# Altium PCB PCB1.PcbDoc
Units mm, origin at the board's own origin, x right, y up, seen from the top; angles counter-clockwise.
Board outline 152.4 x 101.6 mm, 2 copper layers (Top Layer, Bottom Layer); 4 components, 7 nets, 35 pads, 4 vias.
Unrouted connection lines stored in the file: 6.
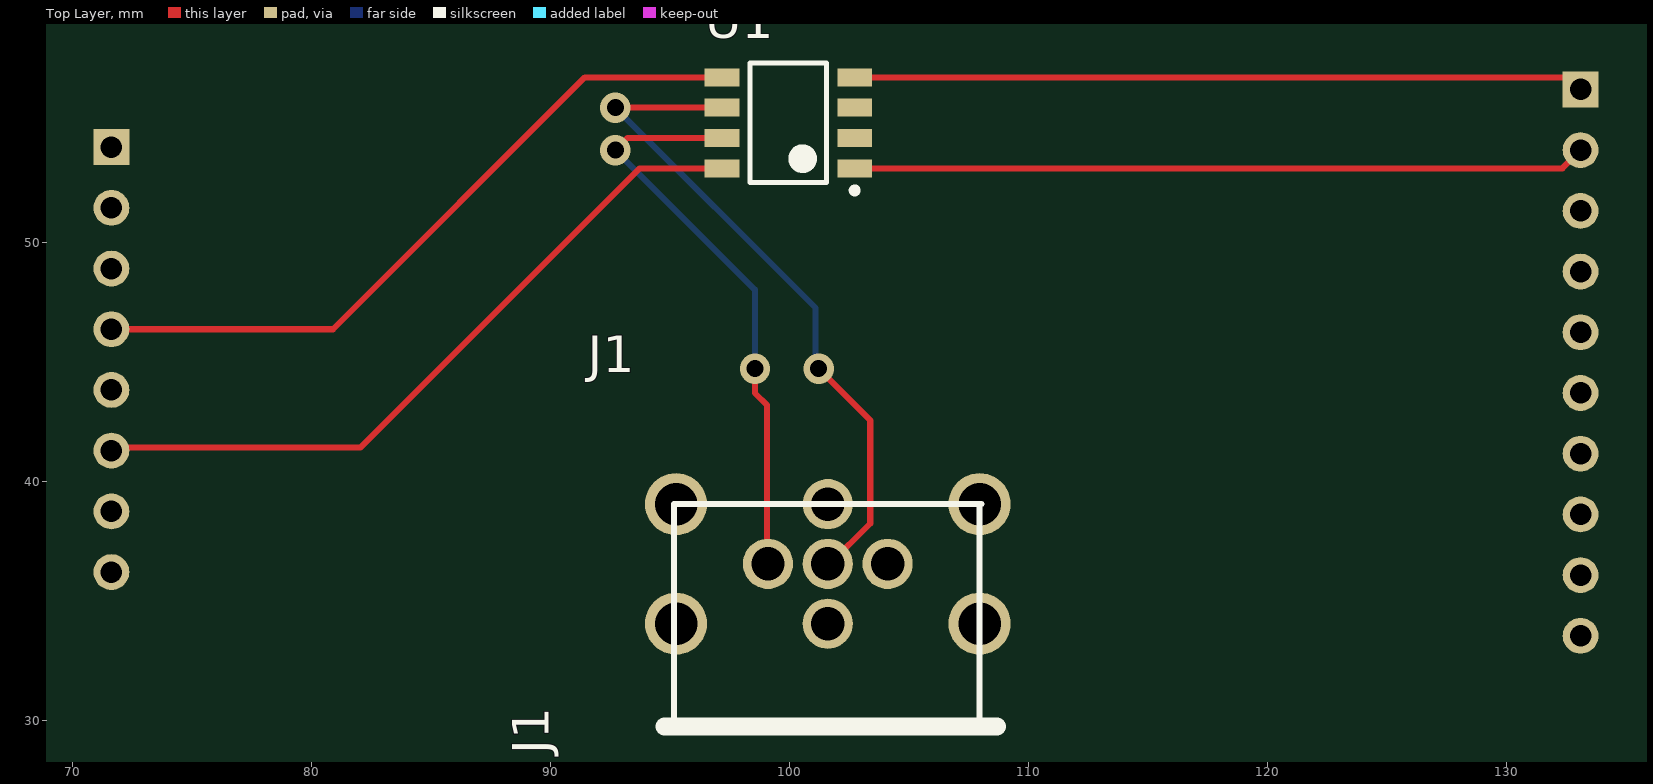
[diagram p0: Top Layer view]
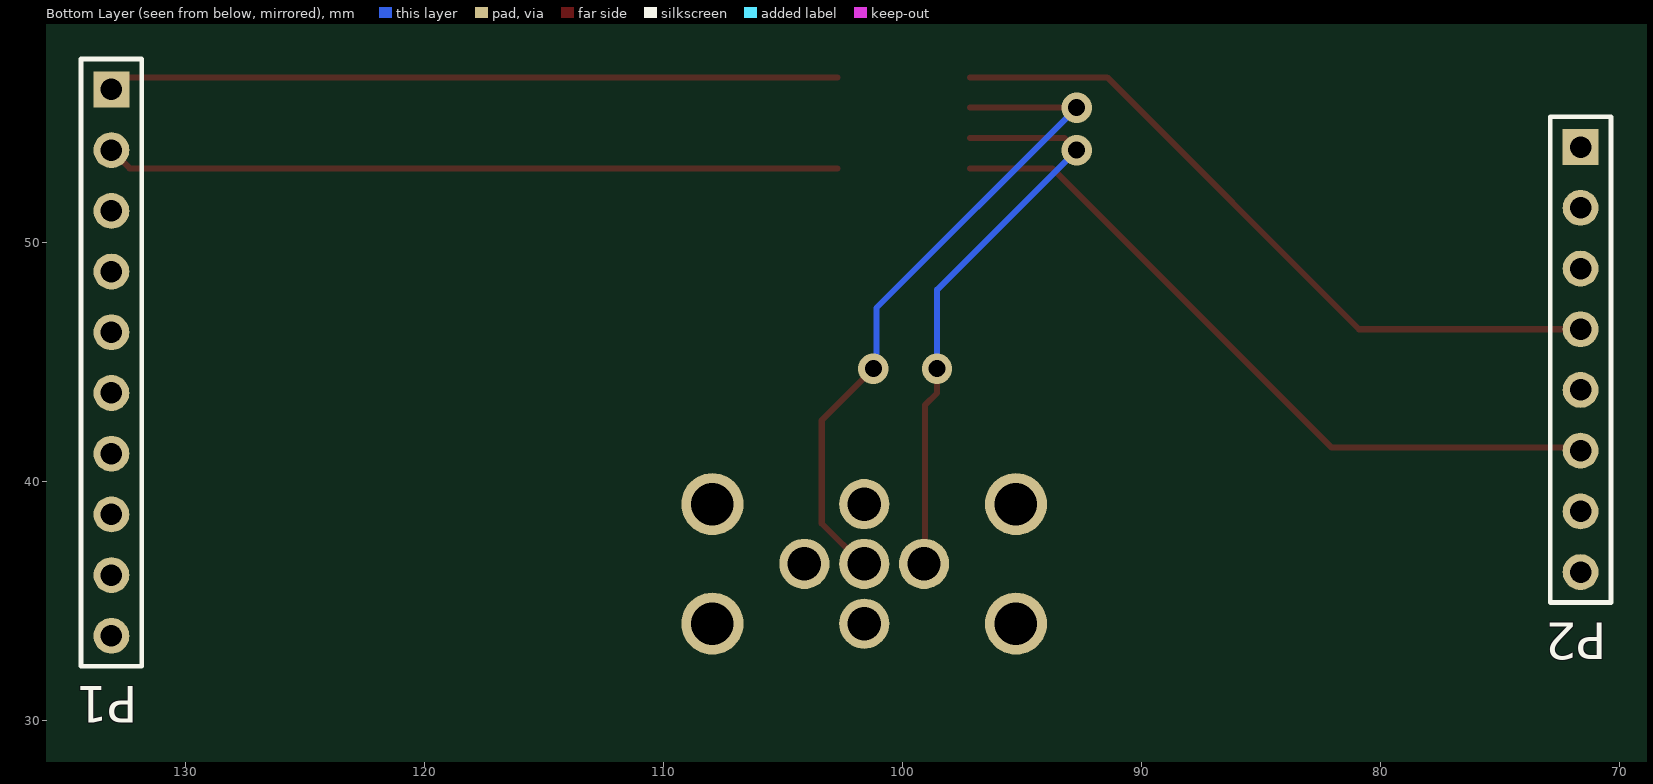
[diagram p1: Bottom Layer view, seen from below]

## Layer stack, top to bottom
Top Solder: solder mask 0.0102, Solder Resist, Dk 3.5
Top Layer: signal copper 0.0356
Dielectric 1: dielectric 0.32, FR-4, Dk 4.8
Bottom Layer: signal copper 0.0356
Bottom Solder: solder mask 0.0102, Solder Resist, Dk 3.5

## Board outline
25.4,25.4 177.8,25.4 177.8,127 25.4,127

## Design rules (kind name [scope] priority, off if disabled: settings)
Clearance [All] p1: gap=0.254 ignorepadtopadclearanceinfootprint=FALSE except(0: Arc-Hole Track-Hole SMDPad-Hole THPad-Hole Via-Hole Fill-Hole Poly-Hole Region-Hole Text-Hole)
PolygonConnect [All] p1: connectstyle=Relief reliefconductorwidth=0.254 reliefentries=4 polygonreliefangle="90 Angle" airgapwidth=0.254
RoutingVias [All] p1: holewidth=0.711 width=1.27 viastyle="Through Hole" minholewidth=0.711 minwidth=1.27 maxholewidth=0.711 maxwidth=1.27
SolderMaskExpansion [All] p1: expansion=0.102
Width [All] p1: maxlimit=0.254 minlimit=0.254 preferedwidth=0.254
30 further rules are at their usual default settings.

## Classes and differential pairs
component class U_Transeiver: U1
component class U_Connector: J1
component class Main: P1 P2

## Components (designator, comment, footprint, x,y, rotation, side; value= is the part's Value field where it differs from the comment)
J1 "MOLEX 84864-9003" "MOLEX 84864-9003" 101.6,36.538 r180 top
P1 "Breakaway Header 10x1" "HDR1X10, BREAKAWAY" 133.096,56.388 r270 bottom
P2 "Breakaway Header 8x1" "HDR1X8, Breakaway" 71.628,53.975 r270 bottom
U1 "SN65HVD234" SN65HVD234DR 99.949,54.991 r180 top

## Footprints (in the part's own frame and the unit in brackets; to place one, negate y for a bottom-side part, rotate by r counter-clockwise, add the part's x,y. Pads: shape width x height; smd on the part's side, far side on the other; paste and mask are expansions set on the pad)
"HDR1X8, Breakaway" [mm] "Connector; Header; 8 Position"
  rect 1.5x1.5 hole 0.9: 1(0,0)
  round 1.5 hole 0.9: 2(2.54,0) 3(5.08,0) 4(7.62,0) 5(10.16,0) 6(12.7,0) 7(15.24,0) 8(17.78,0)
  silkscreen extent -1.27,-1.27 19.05,1.27, body extent -1.27,-1.27 19.05,1.27, height 8.38
"HDR1X10, BREAKAWAY" [mm] "Connector; Header; 10 Position"
  rect 1.5x1.5 hole 0.9: 1(0,0)
  round 1.5 hole 0.9: 2(2.54,0) 3(5.08,0) 4(7.62,0) 5(10.16,0) 6(12.7,0) 7(15.24,0) 8(17.78,0) 9(20.32,0) 10(22.86,0)
  silkscreen extent -1.27,-1.27 24.13,1.27, body extent -1.27,-1.27 24.13,1.27, height 8.38
"MOLEX 84864-9003" [mm] "CONN RCPT MALE M12 5POS SLDR"
  round 2.1 hole 1.397: 1(0,2.502) 2(-2.502,0) 3(0,-2.502) 4(2.502,0) 5(0,0)
  round 2.6 hole 1.778: 6(6.35,2.502) 7(6.35,-2.502) 8(-6.35,2.502) 9(-6.35,-2.502)
  silkscreen extent -7.07,-2.5 6.82,6.8, body extent -10.28,-7.25 10.28,21.25, height 20.54
SN65HVD234DR [mm] "IC CAN TRANSCEIVER 3.3V 8-SOIC"
  rect 1.45x0.75 smd: 1(-2.775,1.905) 2(-2.775,0.635) 3(-2.775,-0.635) 4(-2.775,-1.905) 5(2.775,-1.905) 6(2.775,-0.635) 7(2.775,0.635) 8(2.775,1.905)
  silkscreen extent -2.9,-2.5 1.6,2.95, body extent -3,-2.5 3,2.5, height 1.75

## Part data
J1: "CAN Micro-Change M12, Right Angle, Male", Current Rating=4A, Operating Temperature="-20°C ~ 80°C", Supplier Part Number 1=0848649003-ND, Voltage - Rated="250VAC, 250VDC", Contact Finish=Gold, Detailed Description="5 Position Circular Connector Receptacle, Male Pins Solder Gold", Fastening Type=Threaded, Ingress Protection="IP67 - Dust Tight, Waterproof", Orientation=Keyed, Shell Material, Finish="Brass, Nickel Plated", Supplier 1=Digi-Key
P1: "CONN HEADER .100 SINGL STR 10POS", Current Rating=3A, Manufacturer Part Number=PEC10SADN, Supplier Part Number 1=S1042E-10-ND, Connector Type="Header, Breakaway", Contact Finish - Mating=Tin, Contact Finish - Post=Tin, Contact Finish Thickness - Mating="100µin (2.54µm)", Contact Lenght - Post="0.420\" (10.67mm)", Contact Length - Mating="0.230\" (5.84mm)", Contact Material="Phosphor Bronze", Contact Shape=Square, Contact Type="Male Pin", Detailed Description="10 Positions Header, Breakaway Connector 0.100\" (2.54mm) Through Hole Tin", Fastening Type=Push-Pull, Insulation Height="0.100\" (2.54mm)", Insulation Material="Polybutylene Terephthalate (PBT)", Mounting Type="Through Hole", Number of Positions=10, Overall Contact Length="0.750\" (19.05mm)", Pitch - Mating="0.100\" (2.54mm)", Shrouding=Unshrouded, Style="Board to Board or Cable", Supplier 1=Digi-Key, Termination=Solder
P2: "CONN HEADER .100 SINGL STR 8POS", Current Rating=3A, Manufacturer Part Number=PEC08SADN, Supplier Part Number 1=S1042E-08-ND, Connector Type="Header, Breakaway", Contact Length - Mating="0.230\" (5.84mm)", Contact Length - Post="0.420\" (10.67mm)", Contact Shape=Square, Contact Type="Male Pin", Detailed Description="8 Positions Header, Breakaway Connector 0.100\" (2.54mm) Through Hole Tin", Insulation Height="0.100\" (2.54mm)", Number of Positions=8, Overall Contact Length="0.750\" (19.05mm)", Pitch - Mating="0.100\" (2.54mm)", Supplier 1=Digi-Key
U1: "IC CAN TRANSCEIVER 3.3V 8-SOIC", Manufacturer Part Number=SN65HVD234DR, Operating Temperature="-40°C ~ 125°C", Package / Case=8-SOIC, Supplier Part Number 1=296-27991-1-ND, Voltage - Supply="3 V ~ 3.6 V", Data Rate=1Mbps, Duplex=Half, Number of Drivers/Receivers=1/1, Protocol=CAN, Receiver Hysteresis=100mV, Supplier 1=Digi-Key, Type=Transceiver

## Via types
v1: diameter 1.27, hole 0.711, Top Layer to Bottom Layer, 4 vias

## Nets (pads, with @x,y where several pads share a name; then routed paths per layer and width w, separated by ;. In a path a pad name is that pad's centre, name@x,y a point inside that pad or via, vN(x,y) a via of type N, cw(c..) or ccw(c..) an arc to the next point about the centre after c; other vN are vias at no path point)
GND: J1.3 J1.6 J1.7 J1.8 J1.9
NetJ1_4: J1.4 U1.7 | length 24.6
  Top Layer w0.254: v1(92.71,53.848) 93.218,54.356 U1.7 ; v1(98.552,44.704) 98.552,43.688 99.06,43.18 99.06,36.576 J1.4
  Bottom Layer w0.254: v1(92.71,53.848) 98.552,48.006 v1(98.552,44.704)
NetJ1_5: J1.5 U1.6 | length 28.8
  Top Layer w0.254: v1(92.71,55.626) U1.6 ; v1(101.219,44.704) 103.378,42.545 103.378,38.227 101.689,36.538 J1.5
  Bottom Layer w0.254: v1(92.71,55.626) 101.092,47.244 101.092,44.831 v1(101.219,44.704)
NetP1_1: P1.1 U1.4 | length 30.6
  Top Layer w0.254: U1.4 132.588,56.896 P1.1
NetP1_2: P1.2 U1.1 | length 30.7
  Top Layer w0.254: U1.1 132.334,53.086 P1.2
NetP2_4: P2.4 U1.3 U1.5 | length 29.9
  Top Layer w0.254: P2.4 80.899,46.355 91.44,56.896 U1.5
NetP2_6: P2.6 U1.2 U1.8 | length 30.4
  Top Layer w0.254: P2.6 71.755,41.402 82.042,41.402 93.726,53.086 U1.8
pads on no net: J1.1 J1.2 P1.3 P1.4 P1.5 P1.6 P1.7 P1.8 P1.9 P1.10 P2.1 P2.2 P2.3 P2.5 P2.7 P2.8